# Altium PCB NEW_PCB_2021-12-20.pcbdoc
Units mm, origin at the board's own origin, x right, y up, seen from the top; angles counter-clockwise.
Board outline 30.81 x 33.73 mm, 2 copper layers (Top Layer, Bottom Layer); 1 components, 0 nets, 9 pads, 4 vias.
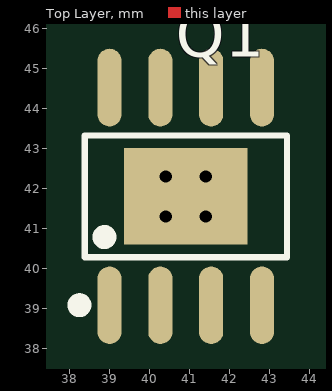
[diagram p0: Top Layer view]
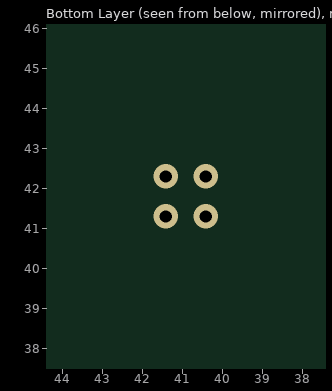
[diagram p1: Bottom Layer view, seen from below]

## Layer stack, top to bottom
Top Layer: signal copper (thickness not stored)
Dielectric: dielectric 0.32, FR-4, Dk 4.8
Bottom Layer: signal copper (thickness not stored)

## Board outline
56.211,25.4 25.4,25.4 25.4,59.126 56.211,59.126

## Components (designator, comment, footprint, x,y, rotation, side; value= is the part's Value field where it differs from the comment)
Q1 "SOIC-8_L4.9-W3.9-P1.27-LS6.0-BL-EP" SOIC-8_L4.9-W3.9-P1.27-LS6.0-BL-EP 40.908,41.791 r0 top

## Footprints (in the part's own frame and the unit in brackets; to place one, negate y for a bottom-side part, rotate by r counter-clockwise, add the part's x,y. Pads: shape width x height; smd on the part's side, far side on the other; paste and mask are expansions set on the pad)
SOIC-8_L4.9-W3.9-P1.27-LS6.0-BL-EP [mm]
  oval 0.602x1.941 smd: 1(-1.905,-2.72) 2(-0.635,-2.72) 3(0.635,-2.72) 4(1.905,-2.72) 5(1.905,2.72) 6(0.635,2.72) 7(-0.635,2.72) 8(-1.905,2.72)
  rect 3.098x2.41 smd: 9(0,0)
  silkscreen extent -2.81,-2.87 2.53,1.52

## Via types
v1: diameter 0.61, hole 0.305, Top Layer to Bottom Layer, 4 vias

## Nets (pads, with @x,y where several pads share a name; then routed paths per layer and width w, separated by ;. In a path a pad name is that pad's centre, name@x,y a point inside that pad or via, vN(x,y) a via of type N, cw(c..) or ccw(c..) an arc to the next point about the centre after c; other vN are vias at no path point)
pads on no net: Q1.1 Q1.2 Q1.3 Q1.4 Q1.5 Q1.6 Q1.7 Q1.8 Q1.9
copper on no net:
  other v1: 40.409,41.291 41.409,41.291 40.409,42.291 41.409,42.291